# Altium PCB NumatoShieldWithVias.PcbDoc (part 3 of 4)
Units mil, origin at the board's own origin, x right, y up, seen from the top; angles counter-clockwise.
Board outline 5000 x 5000 mil, 4 copper layers (Top Layer, Mid-Layer 1, Mid-Layer 2, Bottom Layer); 8 components, 163 nets, 352 pads, 43 vias.
Unrouted connection lines stored in the file: 11.
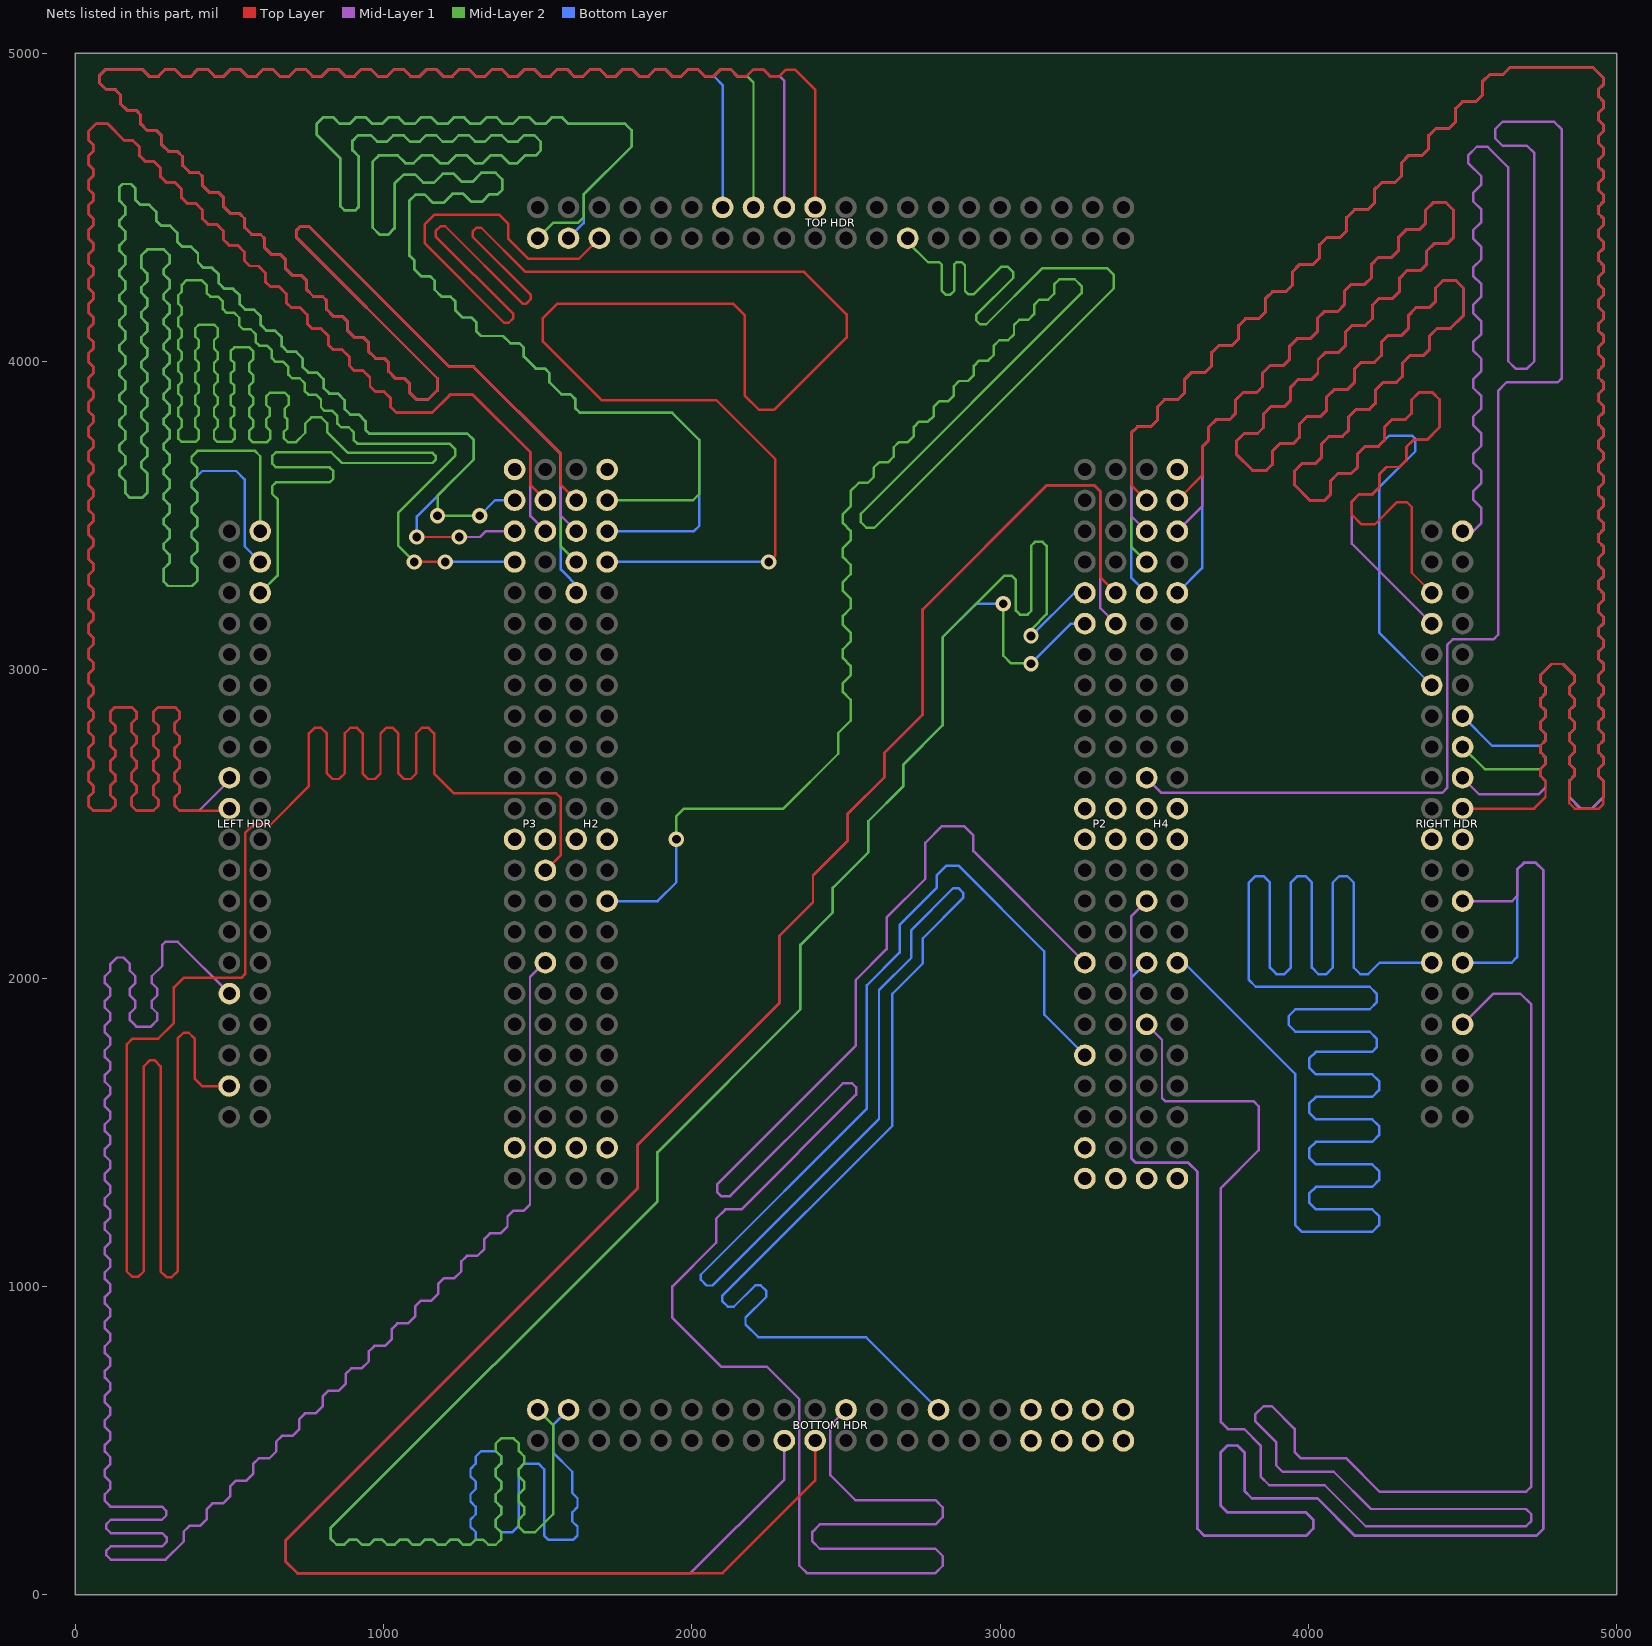
[diagram p5: the nets of this part, all layers, seen from the top]

## Via types
v1: diameter 50, hole 28, Top Layer to Bottom Layer, 43 vias

## Nets (pads, with @x,y where several pads share a name; then routed paths per layer and width w, separated by ;. In a path a pad name is that pad's centre, name@x,y a point inside that pad or via, vN(x,y) a via of type N, cw(c..) or ccw(c..) an arc to the next point about the centre after c; other vN are vias at no path point) (continued)
F18: "TOP HDR.33" H2.40 | length 6911.2
  Bottom Layer w8: H2.40@1650,3250 1637.5,3262.5 1575,3325 1575,3700 1292,3983 1214,3983 758,4439 731,4439 719,4427 719,4401 1174,3946 1174,3906 1145,3877 1107,3877 1084,3900 1084,3929 1069,3944 1040,3944 1017,3967 1017,3996 1002,4011 973,4011 950,4034 950,4063 935,4078 906,4078 883,4101 883,4130 868,4145 839,4145 816,4168 816,4197 801,4212 772,4212 749,4235 749,4264 734,4279 705,4279 682,4302 682,4331 667,4346 638,4346 615,4369 615,4398 600,4413 571,4413 548,4436 548,4465 533,4480 504,4480 481,4503 481,4532 466,4547 437,4547 414,4570 414,4599 399,4614 370,4614 347,4637 347,4666 332,4681 303,4681 280,4704 280,4733 265,4748 235,4748 213,4770 213,4799 198,4814 169,4814 146,4837 146,4866 131,4881 102,4881 79,4904 79,4928 98,4947 218,4947 239,4926 270,4926 291,4947 324,4947 345,4926 376,4926 397,4947 430,4947 451,4926 482,4926 503,4947 536,4947 557,4926 588,4926 609,4947 642,4947 663,4926 694,4926 715,4947 748,4947 769,4926 800,4926 821,4947 854,4947 875,4926 906,4926 927,4947 960,4947 981,4926 1012,4926 1033,4947 1066,4947 1087,4926 1118,4926 1139,4947 1172,4947 1193,4926 1224,4926 1245,4947 1278,4947 1299,4926 1330,4926 1351,4947 1384,4947 1405,4926 1436,4926 1457,4947 1490,4947 1511,4926 1542,4926 1563,4947 1596,4947 1617,4926 1648,4926 1669,4947 1702,4947 1723,4926 1754,4926 1775,4947 1808,4947 1829,4926 1860,4926 1881,4947 1914,4947 1935,4926 1966,4926 1987,4947 2020,4947 2041,4926 2071,4926 2100,4897 2100,4500
G8: "LEFT HDR.15" P3.15 | length 6865.7
  Mid-Layer 1 w8: 500,1950 332,2118 292,2118 282,2108 282,2040 248,2006 248,1984 266,1966 266,1944 248,1926 248,1904 266,1886 266,1864 245,1843 198,1843 177,1864 177,1886 195,1904 195,1926 177,1944 177,1966 195,1984 195,2006 177,2024 177,2046 156,2067 135,2067 114,2046 114,2024 96,2006 96,1984 114,1966 114,1944 96,1926 96,1904 114,1886 114,1864 96,1846 96,1824 114,1806 114,1784 96,1766 96,1744 114,1726 114,1704 96,1686 96,1664 114,1646 114,1624 96,1606 96,1584 114,1566 114,1544 96,1526 96,1504 114,1486 114,1464 96,1446 96,1424 114,1406 114,1384 96,1366 96,1344 114,1326 114,1304 96,1286 96,1264 114,1246 114,1224 96,1206 96,1184 114,1166 114,1144 96,1126 96,1104 114,1086 114,1064 96,1046 96,1024 114,1006 114,984 96,966 96,944 114,926 114,904 96,886 96,864 114,846 114,824 96,806 96,784 114,766 114,744 96,726 96,704 114,686 114,664 96,646 96,624 114,606 114,584 96,566 96,544 114,526 114,504 96,486 96,464 114,446 114,424 96,406 96,384 114,366 114,344 96,326 96,304 114,286 281,286 295,272 295,257 281,243 115,243 101,229 101,214 115,200 282,200 296,186 296,171 282,157 115,157 101,143 101,128 115,114 293,114 352,173 352,205 370,223 404,223 427,246 427,278 445,296 479,296 502,319 502,351 520,369 554,369 577,392 577,424 595,442 629,442 652,465 652,497 670,515 704,515 727,538 727,570 745,588 779,588 802,611 802,643 820,661 854,661 877,684 877,716 895,734 929,734 952,757 952,789 970,807 1004,807 1027,830 1027,862 1045,880 1079,880 1102,903 1102,935 1120,953 1154,953 1177,976 1177,1008 1195,1026 1229,1026 1252,1049 1252,1081 1270,1099 1304,1099 1327,1122 1327,1154 1345,1172 1379,1172 1402,1195 1402,1227 1420,1245 1454,1245 1475,1266 1475,2004 P3.15@1521,2050
G9: "TOP HDR.12" H2.19 | length 6987.7
  Mid-Layer 2 w8: v1(1950,2450) 1950,2526 1974,2550 2297,2550 2475,2728 2475,2795 2515,2835 2515,2903 2490,2928 2490,2957 2515,2982 2515,3013 2490,3038 2490,3067 2515,3092 2515,3121 2490,3146 2490,3175 2515,3200 2515,3231 2490,3256 2490,3285 2515,3310 2515,3341 2490,3366 2490,3395 2515,3420 2515,3451 2490,3476 2490,3505 2515,3530 2515,3580 2542,3607 2571,3607 2590,3626 2590,3656 2607,3673 2636,3673 2655,3692 2655,3722 2672,3739 2701,3739 2720,3758 2720,3788 2737,3805 2766,3805 2785,3824 2785,3854 2802,3871 2831,3871 2850,3890 2850,3920 2867,3937 2896,3937 2915,3956 2915,3986 2932,4003 2961,4003 2980,4022 2980,4052 2997,4069 3026,4069 3045,4088 3045,4118 3062,4135 3091,4135 3110,4154 3110,4184 3127,4201 3156,4201 3175,4220 3175,4250 3192,4267 3242,4267 3264,4245 3264,4222 2548,3506 2548,3479 2566,3461 2592,3461 3369,4238 3369,4281 3348,4302 3136,4302 2955,4121 2935,4121 2922,4134 2922,4151 3043,4272 3043,4289 3025,4307 3003,4307 2914,4218 2897,4218 2886,4229 2886,4312 2876,4322 2858,4322 2851,4315 2851,4229 2839,4217 2823,4217 2811,4229 2811,4314 2803,4322 2766,4322 2700,4388 2700,4400
  Bottom Layer w8: H2.19@1725,2250 1889,2250 1950,2311 v1(1950,2450)
G11: "LEFT HDR.18" P3.21 | length 6918.8
  Top Layer w8: 499.17,1650 411,1650 387,1674 387,1804 368,1823 351,1823 332,1804 332,1049 313,1030 296,1030 277,1049 277,1714 258,1733 241,1733 222,1714 222,1049 204,1031 185,1031 167,1049 167,1785 186,1804 269,1804 320,1855 320,1970 351,2001 539,2001 551,2013 551,2470.3 579.7,2499 634,2499 758,2623 758,2794 776,2812 798,2812 816,2794 816,2664 834,2646 856,2646 874,2664 874,2794 892,2812 914,2812 932,2794 932,2664 950,2646 972,2646 990,2664 990,2794 1008,2812 1030,2812 1048,2794 1048,2664 1066,2646 1088,2646 1106,2664 1106,2794 1124,2812 1146,2812 1164,2794 1164,2664 1229,2599 1560,2599 1575,2584 1575,2400 P3.21@1525,2350
G13: "LEFT HDR.39" P3.46 | length 6865.6
  Mid-Layer 2 w8: 600,3450 600,3693 583,3710 396,3710 377,3691 377,3674 396,3655 396,3629 377,3610 377,3593 396,3574 396,3548 377,3529 377,3512 396,3493 396,3467 377,3448 377,3431 396,3412 396,3386 377,3367 377,3350 396,3331 396,3289 379,3272 301,3272 287,3286 287,3328 306,3347 306,3373 287,3392 287,3409 306,3428 306,3454 287,3473 287,3490 306,3509 306,3535 287,3554 287,3571 306,3590 306,3616 287,3635 287,3652 306,3671 306,3697 287,3716 287,3733 306,3752 306,3778 287,3797 287,3814 306,3833 306,3859 287,3878 287,3895 306,3914 306,3940 287,3959 287,3976 306,3995 306,4021 287,4040 287,4057 306,4076 306,4102 287,4121 287,4138 306,4157 306,4183 287,4202 287,4219 306,4238 306,4264 287,4283 287,4300 306,4319 306,4345 287,4364 234,4364 214,4344 214,4305 233,4286 233,4260 214,4241 214,4224 233,4205 233,4179 214,4160 214,4143 233,4124 233,4098 214,4079 214,4062 233,4043 233,4017 214,3998 214,3981 233,3962 233,3936 214,3917 214,3900 233,3881 233,3855 214,3836 214,3819 233,3800 233,3774 214,3755 214,3738 233,3719 233,3693 214,3674 214,3657 233,3638 233,3574 217,3558 178,3558 162,3574 162,3612 143,3631 143,3648 162,3667 162,3693 143,3712 143,3729 162,3748 162,3774 143,3793 143,3810 162,3829 162,3855 143,3874 143,3891 162,3910 162,3936 143,3955 143,3972 162,3991 162,4017 143,4036 143,4053 162,4072 162,4098 143,4117 143,4134 162,4153 162,4179 143,4198 143,4215 162,4234 162,4260 143,4279 143,4296 162,4315 162,4341 143,4360 143,4377 162,4396 162,4422 143,4441 143,4458 162,4477 162,4503 143,4522 143,4566 153,4576 181,4576 194,4563 194,4526 212,4508 240,4508 262,4486 262,4458 280,4440 308,4440 330,4418 330,4390 348,4372 376,4372 398,4350 398,4322 416,4304 444,4304 466,4282 466,4254 484,4236 512,4236 534,4214 534,4186 552,4168 580,4168 602,4146 602,4118 620,4100 648,4100 670,4078 670,4050 688,4032 716,4032 738,4010 738,3982 756,3964 784,3964 806,3942 806,3914 824,3896 852,3896 874,3874 874,3846 892,3828 920,3828 942,3806 942,3778 954,3766 1272,3766 1293,3745 1293,3683 1175,3565 v1(1175,3500) v1(1312,3500)
  Bottom Layer w8: v1(1312,3500) 1362,3550 P3.46@1425,3550
G14: "LEFT HDR.37" P3.42 | length 6865.6
  Top Layer w8: v1(1100,3350) v1(1200,3350)
  Mid-Layer 2 w8: 504,3815 504,3790 517,3777 517,3750 507,3740 460,3740 450,3750 450,3777 462,3789 462,3811 450,3823 450,3850 462,3862 462,3884 450,3896 450,3923 462,3935 462,3957 450,3969 450,3996 462,4008 462,4030 450,4042 450,4069 462,4081 462,4108 450,4120 401,4120 389,4108 389,4081 401,4069 401,4047 389,4035 389,4008 401,3996 401,3974 389,3962 389,3935 401,3923 401,3901 389,3889 389,3862 401,3850 401,3828 389,3816 389,3789 401,3777 401,3750 391,3740 344,3740 334,3750 334,3777 346,3789 346,3811 334,3823 334,3850 346,3862 346,3884 334,3896 334,3923 346,3935 346,3957 334,3969 334,3996 346,4008 346,4030 334,4042 334,4069 346,4081 346,4103 334,4115 334,4142 346,4154 346,4176 334,4188 334,4215 346,4227 346,4249 361,4264 410,4264 426,4248 426,4223 438,4211 463,4211 479,4195 479,4170 491,4158 516,4158 532,4142 532,4117 544,4105 569,4105 585,4089 585,4064 597,4052 622,4052 638,4036 638,4011 650,3999 675,3999 691,3983 691,3958 703,3946 728,3946 744,3930 744,3905 756,3893 781,3893 797,3877 797,3852 809,3840 834,3840 850,3824 850,3799 862,3787 887,3787 903,3771 903,3746 915,3734 1214,3734 1233,3715 1233,3695 1047,3509 1047,3403 v1(1100,3350) ; 505,3816 516,3827 516,3849 504,3861 504,3888 516,3900 516,3922 504,3934 504,3961 516,3973 516,3995 504,4007 504,4034 516,4046 565,4046 577,4034 577,4007 565,3995 565,3968 577,3956 577,3934 565,3922 565,3895 577,3883 577,3861 565,3849 565,3822 577,3810 577,3788 565,3776 565,3749 575,3739 622,3739 632,3749 632,3776 619,3789 619,3813 631,3825 631,3848 619,3860 619,3887 631,3899 680,3899 692,3887 692,3860 679,3847 679,3822 687,3814 687,3782 676,3771 676,3752 689,3739 716,3739 746,3769 746,3799 766,3819 798,3819 817,3800 817,3771 884,3704 1159,3704 1169,3694 1169,3681 1159,3671 865,3671 830,3706 651,3706 639,3694 639,3669 651,3657 825,3657 837,3645 837,3620 825,3608 651,3608 639,3596 639,3571 656,3554 656,3306 600,3250
  Bottom Layer w8: v1(1200,3350) P3.42@1425,3350
G16: "TOP HDR.2" H2.41 | length 6926.7
  Top Layer w8: 1700,4400 1633,4333 1470,4333 1405,4398 1405,4446 1374,4477 1165,4477 1133,4445 1133,4384 1391,4126 1406,4126 1421,4141 1421,4154 1169,4406 1169,4423 1185,4439 1200,4439 1451,4188 1463,4188 1477,4202 1477,4217 1289,4405 1289,4422 1301,4434 1317,4434 1460,4291 2364,4291 2502,4153 2502,4078 2268,3844 2217,3844 2171,3890 2171,4151 2135,4187 1563,4187 1517,4141 1517,4065 1707,3875 2079,3875 2271,3683 2271,3371 v1(2250,3350)
  Bottom Layer w8: H2.41@1725,3350 v1(2250,3350)
G18: "TOP HDR.32" H2.42 | length 6950.9
  Mid-Layer 2 w8: H2.42@1622,3350 H2.42@1625,3350 ; H2.42@1650,3350 H2.42@1625,3350 ; 2200,4500 2200,4905 2179,4926 2147,4926 2126,4947 2093,4947 2072,4926 2041,4926 2020,4947 1987,4947 1966,4926 1935,4926 1914,4947 1881,4947 1860,4926 1829,4926 1808,4947 1775,4947 1754,4926 1723,4926 1702,4947 1669,4947 1648,4926 1617,4926 1596,4947 1563,4947 1542,4926 1511,4926 1490,4947 1457,4947 1436,4926 1405,4926 1384,4947 1351,4947 1330,4926 1299,4926 1278,4947 1245,4947 1224,4926 1193,4926 1172,4947 1139,4947 1118,4926 1087,4926 1066,4947 1033,4947 1012,4926 981,4926 960,4947 927,4947 906,4926 875,4926 854,4947 821,4947 800,4926 769,4926 748,4947 715,4947 694,4926 663,4926 642,4947 609,4947 588,4926 557,4926 536,4947 503,4947 482,4926 451,4926 430,4947 397,4947 376,4926 345,4926 324,4947 291,4947 270,4926 239,4926 218,4947 98,4947 79,4928 79,4904 102,4881 131,4881 146,4866 146,4837 169,4814 198,4814 213,4799 213,4770 235,4748 265,4748 280,4733 280,4704 303,4681 332,4681 347,4666 347,4637 370,4614 399,4614 414,4599 414,4570 437,4547 466,4547 481,4532 481,4503 504,4480 533,4480 548,4465 548,4436 571,4413 600,4413 615,4398 615,4369 638,4346 667,4346 682,4331 682,4302 705,4279 734,4279 749,4264 749,4235 772,4212 801,4212 816,4197 816,4168 839,4145 868,4145 883,4130 883,4101 906,4078 935,4078 950,4063 950,4034 973,4011 1002,4011 1017,3996 1017,3967 1040,3944 1069,3944 1084,3929 1084,3900 1107,3877 1145,3877 1174,3906 1174,3946 719,4401 719,4427 731,4439 758,4439 1214,3983 1292,3983 1575,3700 1575,3400 H2.42@1625,3350
GND: "BOTTOM HDR.16" "BOTTOM HDR.17" "BOTTOM HDR.18" "BOTTOM HDR.19" "BOTTOM HDR.20" "BOTTOM HDR.21" "BOTTOM HDR.22" "BOTTOM HDR.23" "RIGHT HDR.10" "RIGHT HDR.29" H2.3 H2.4 H2.23 H2.24 H2.47 H4.1 H4.2 H4.23 H4.24 H4.25 H4.26 H4.47 P2.1 P2.2 P2.23 P2.24 P2.25 P2.26 P3.3 P3.4 P3.23 P3.24 P3.48
H12: "LEFT HDR.9" P3.45 | length 6853.5
  Top Layer w8: 500,2550 493,2543 339,2543 323,2559 323,2587 339,2603 339,2623 323,2639 323,2667 339,2683 339,2703 323,2719 323,2747 339,2763 339,2783 323,2799 323,2827 339,2843 339,2863 323,2879 269,2879 253,2863 253,2835 269,2819 269,2799 253,2783 253,2755 269,2739 269,2719 253,2703 253,2675 269,2659 269,2639 253,2623 253,2595 269,2579 269,2559 253,2543 199,2543 183,2559 183,2587 199,2603 199,2623 183,2639 183,2667 199,2683 199,2703 183,2719 183,2747 199,2763 199,2783 183,2799 183,2827 199,2843 199,2863 183,2879 129,2879 113,2863 113,2835 129,2819 129,2799 113,2783 113,2755 129,2739 129,2719 113,2703 113,2675 129,2659 129,2639 113,2623 113,2595 129,2579 129,2559 113,2543 59,2543 43,2559 43,2587 59,2603 59,2623 43,2639 43,2667 59,2683 59,2703 43,2719 43,2747 59,2763 59,2783 43,2799 43,2827 59,2843 59,2863 43,2879 43,2907 59,2923 59,2943 43,2959 43,2987 59,3003 59,3023 43,3039 43,3067 59,3083 59,3103 43,3119 43,3147 59,3163 59,3183 43,3199 43,3227 59,3243 59,3263 43,3279 43,3307 59,3323 59,3343 43,3359 43,3387 59,3403 59,3423 43,3439 43,3467 59,3483 59,3503 43,3519 43,3547 59,3563 59,3583 43,3599 43,3627 59,3643 59,3663 43,3679 43,3707 59,3723 59,3743 43,3759 43,3787 59,3803 59,3823 43,3839 43,3867 59,3883 59,3903 43,3919 43,3947 59,3963 59,3983 43,3999 43,4027 59,4043 59,4063 43,4079 43,4107 59,4123 59,4143 43,4159 43,4187 59,4203 59,4223 43,4239 43,4267 59,4283 59,4303 43,4319 43,4347 59,4363 59,4383 43,4399 43,4427 59,4443 59,4463 43,4479 43,4507 59,4523 59,4543 43,4559 43,4587 59,4603 59,4623 43,4639 43,4667 59,4683 59,4703 43,4719 43,4747 68,4772 104,4772 158,4718 186,4718 208,4696 208,4668 226,4650 254,4650 276,4628 276,4600 294,4582 322,4582 344,4560 344,4532 362,4514 390,4514 412,4492 412,4464 430,4446 458,4446 480,4424 480,4396 498,4378 526,4378 548,4356 548,4328 566,4310 594,4310 616,4288 616,4260 634,4242 662,4242 684,4220 684,4192 702,4174 730,4174 752,4152 752,4124 770,4106 798,4106 820,4084 820,4056 838,4038 866,4038 888,4016 888,3988 906,3970 934,3970 956,3948 956,3920 974,3902 1002,3902 1024,3880 1024,3852 1042,3834 1157,3834 1215,3892 1290,3892 1476,3706 1476,3599 P3.45@1525,3550
H13: "TOP HDR.1" H2.43 | length 6906.5
  Bottom Layer w8: 1600,4400 1649,4449 1649,4542 1805,4698 1805,4750 1784,4771 1600,4771 1579,4792 1546,4792 1525,4771 1494,4771 1473,4792 1440,4792 1419,4771 1388,4771 1367,4792 1334,4792 1313,4771 1282,4771 1261,4792 1228,4792 1207,4771 1176,4771 1155,4792 1122,4792 1101,4771 1070,4771 1049,4792 1016,4792 995,4771 964,4771 943,4792 910,4792 889,4771 858,4771 837,4792 804,4792 783,4771 783,4736 860,4659 860,4504 873,4491 909,4491 919,4501 919,4666 899,4686 899,4716 917,4734 959,4734 980,4713 1011,4713 1032,4734 1065,4734 1086,4713 1117,4713 1138,4734 1171,4734 1192,4713 1223,4713 1244,4734 1277,4734 1298,4713 1329,4713 1350,4734 1383,4734 1404,4713 1435,4713 1456,4734 1489,4734 1510,4713 1510,4685 1494,4669 1459,4669 1434,4644 1407,4644 1382,4669 1347,4669 1322,4644 1295,4644 1270,4669 1235,4669 1210,4644 1183,4644 1158,4669 1123,4669 1098,4644 1071,4644 1046,4669 985,4669 965,4649 965,4434 988,4411 1014,4411 1036,4433 1036,4577 1065,4606 1103,4606 1129,4580 1163,4580 1192,4609 1228,4609 1254,4583 1288,4583 1317,4612 1364,4612 1385,4591 1385,4557 1371,4543 1344,4543 1319,4518 1285,4518 1259,4544 1223,4544 1194,4515 1160,4515 1134,4541 1103,4541 1084,4522 1084,4344 1099,4329 1099,4300 1122,4277 1151,4277 1166,4262 1166,4233 1189,4210 1218,4210 1233,4195 1233,4166 1256,4143 1285,4143 1300,4128 1300,4099 1316,4083 1388,4083 1411,4060 1440,4060 1455,4045 1455,4016 1494,3977 1523,3977 1538,3962 1538,3933 1577,3894 1606,3894 1621,3879 1621,3850 1637,3834 1936,3834 2024,3746 2024,3467 2007,3450 H2.43@1725,3450
H14: "TOP HDR.31" H2.44 | length 6968.2
  Mid-Layer 1 w8: H2.44@1650,3450 H2.44@1625,3450 1575,3500 1575,3700 1292,3983 1214,3983 758,4439 731,4439 719,4427 719,4401 1174,3946 1174,3906 1145,3877 1107,3877 1084,3900 1084,3929 1069,3944 1040,3944 1017,3967 1017,3996 1002,4011 973,4011 950,4034 950,4063 935,4078 906,4078 883,4101 883,4130 868,4145 839,4145 816,4168 816,4197 801,4212 772,4212 749,4235 749,4264 734,4279 705,4279 682,4302 682,4331 667,4346 638,4346 615,4369 615,4398 600,4413 571,4413 548,4436 548,4465 533,4480 504,4480 481,4503 481,4532 466,4547 437,4547 414,4570 414,4599 399,4614 370,4614 347,4637 347,4666 332,4681 303,4681 280,4704 280,4733 265,4748 235,4748 213,4770 213,4799 198,4814 169,4814 146,4837 146,4866 131,4881 102,4881 79,4904 79,4928 98,4947 218,4947 239,4926 270,4926 291,4947 324,4947 345,4926 376,4926 397,4947 430,4947 451,4926 482,4926 503,4947 536,4947 557,4926 588,4926 609,4947 642,4947 663,4926 694,4926 715,4947 748,4947 769,4926 800,4926 821,4947 854,4947 875,4926 906,4926 927,4947 960,4947 981,4926 1012,4926 1033,4947 1066,4947 1087,4926 1118,4926 1139,4947 1172,4947 1193,4926 1224,4926 1245,4947 1278,4947 1299,4926 1330,4926 1351,4947 1384,4947 1405,4926 1436,4926 1457,4947 1490,4947 1511,4926 1542,4926 1563,4947 1596,4947 1617,4926 1648,4926 1669,4947 1702,4947 1723,4926 1754,4926 1775,4947 1808,4947 1829,4926 1860,4926 1881,4947 1914,4947 1935,4926 1966,4926 1987,4947 2020,4947 2041,4926 2072,4926 2093,4947 2126,4947 2147,4926 2178,4926 2199,4947 2232,4947 2253,4926 2284,4926 2300,4910 2300,4500
H15: "LEFT HDR.8" P3.43 | length 6999.6
  Mid-Layer 1 w8: 500,2650 500,2642 401,2543 339,2543 323,2559 323,2587 339,2603 339,2623 323,2639 323,2667 339,2683 339,2703 323,2719 323,2747 339,2763 339,2783 323,2799 323,2827 339,2843 339,2863 323,2879 269,2879 253,2863 253,2835 269,2819 269,2799 253,2783 253,2755 269,2739 269,2719 253,2703 253,2675 269,2659 269,2639 253,2623 253,2595 269,2579 269,2559 253,2543 199,2543 183,2559 183,2587 199,2603 199,2623 183,2639 183,2667 199,2683 199,2703 183,2719 183,2747 199,2763 199,2783 183,2799 183,2827 199,2843 199,2863 183,2879 129,2879 113,2863 113,2835 129,2819 129,2799 113,2783 113,2755 129,2739 129,2719 113,2703 113,2675 129,2659 129,2639 113,2623 113,2595 129,2579 129,2559 113,2543 59,2543 43,2559 43,2587 59,2603 59,2623 43,2639 43,2667 59,2683 59,2703 43,2719 43,2747 59,2763 59,2783 43,2799 43,2827 59,2843 59,2863 43,2879 43,2907 59,2923 59,2943 43,2959 43,2987 59,3003 59,3023 43,3039 43,3067 59,3083 59,3103 43,3119 43,3147 59,3163 59,3183 43,3199 43,3227 59,3243 59,3263 43,3279 43,3307 59,3323 59,3343 43,3359 43,3387 59,3403 59,3423 43,3439 43,3467 59,3483 59,3503 43,3519 43,3547 59,3563 59,3583 43,3599 43,3627 59,3643 59,3663 43,3679 43,3707 59,3723 59,3743 43,3759 43,3787 59,3803 59,3823 43,3839 43,3867 59,3883 59,3903 43,3919 43,3947 59,3963 59,3983 43,3999 43,4027 59,4043 59,4063 43,4079 43,4107 59,4123 59,4143 43,4159 43,4187 59,4203 59,4223 43,4239 43,4267 59,4283 59,4303 43,4319 43,4347 59,4363 59,4383 43,4399 43,4427 59,4443 59,4463 43,4479 43,4507 59,4523 59,4543 43,4559 43,4587 59,4603 59,4623 43,4639 43,4667 59,4683 59,4703 43,4719 43,4747 68,4772 104,4772 158,4718 186,4718 208,4696 208,4668 226,4650 254,4650 276,4628 276,4600 294,4582 322,4582 344,4560 344,4532 362,4514 390,4514 412,4492 412,4464 430,4446 458,4446 480,4424 480,4396 498,4378 526,4378 548,4356 548,4328 566,4310 594,4310 616,4288 616,4260 634,4242 662,4242 684,4220 684,4192 702,4174 730,4174 752,4152 752,4124 770,4106 798,4106 820,4084 820,4056 838,4038 866,4038 888,4016 888,3988 906,3970 934,3970 956,3948 956,3920 974,3902 1002,3902 1024,3880 1024,3852 1042,3834 1157,3834 1215,3892 1290,3892 1476,3706 1476,3499 P3.43@1525,3450
H16: "LEFT HDR.38" P3.44 | length 6925.6
  Top Layer w8: v1(1108,3431) v1(1245,3431)
  Mid-Layer 1 w8: v1(1245,3431) 1313,3431 1332,3450 P3.44@1425,3450
  Bottom Layer w8: 600,3350 549,3401 549,3618 522,3645 412,3645 377,3610 377,3593 396,3574 396,3548 377,3529 377,3512 396,3493 396,3467 377,3448 377,3431 396,3412 396,3386 377,3367 377,3350 396,3331 396,3289 379,3272 301,3272 287,3286 287,3328 306,3347 306,3373 287,3392 287,3409 306,3428 306,3454 287,3473 287,3490 306,3509 306,3535 287,3554 287,3571 306,3590 306,3616 287,3635 287,3652 306,3671 306,3697 287,3716 287,3733 306,3752 306,3778 287,3797 287,3814 306,3833 306,3859 287,3878 287,3895 306,3914 306,3940 287,3959 287,3976 306,3995 306,4021 287,4040 287,4057 306,4076 306,4102 287,4121 287,4138 306,4157 306,4183 287,4202 287,4219 306,4238 306,4264 287,4283 287,4300 306,4319 306,4345 287,4364 234,4364 214,4344 214,4305 233,4286 233,4260 214,4241 214,4224 233,4205 233,4179 214,4160 214,4143 233,4124 233,4098 214,4079 214,4062 233,4043 233,4017 214,3998 214,3981 233,3962 233,3936 214,3917 214,3900 233,3881 233,3855 214,3836 214,3819 233,3800 233,3774 214,3755 214,3738 233,3719 233,3693 214,3674 214,3657 233,3638 233,3574 217,3558 178,3558 162,3574 162,3612 143,3631 143,3648 162,3667 162,3693 143,3712 143,3729 162,3748 162,3774 143,3793 143,3810 162,3829 162,3855 143,3874 143,3891 162,3910 162,3936 143,3955 143,3972 162,3991 162,4017 143,4036 143,4053 162,4072 162,4098 143,4117 143,4134 162,4153 162,4179 143,4198 143,4215 162,4234 162,4260 143,4279 143,4296 162,4315 162,4341 143,4360 143,4377 162,4396 162,4422 143,4441 143,4458 162,4477 162,4503 143,4522 143,4566 153,4576 181,4576 194,4563 194,4526 212,4508 240,4508 262,4486 262,4458 280,4440 308,4440 330,4418 330,4390 348,4372 376,4372 398,4350 398,4322 416,4304 444,4304 466,4282 466,4254 484,4236 512,4236 534,4214 534,4186 552,4168 580,4168 602,4146 602,4118 620,4100 648,4100 670,4078 670,4050 688,4032 716,4032 738,4010 738,3982 756,3964 784,3964 806,3942 806,3914 824,3896 852,3896 874,3874 874,3846 892,3828 920,3828 942,3806 942,3778 954,3766 1272,3766 1293,3745 1293,3683 1108,3498 v1(1108,3431)
INITB: P2.4
J13: "TOP HDR.0" H2.45 | length 6893.6
  Mid-Layer 2 w8: 1500,4400 1551,4451 1632,4451 1649,4468 1649,4542 1805,4698 1805,4750 1784,4771 1600,4771 1579,4792 1546,4792 1525,4771 1494,4771 1473,4792 1440,4792 1419,4771 1388,4771 1367,4792 1334,4792 1313,4771 1282,4771 1261,4792 1228,4792 1207,4771 1176,4771 1155,4792 1122,4792 1101,4771 1070,4771 1049,4792 1016,4792 995,4771 964,4771 943,4792 910,4792 889,4771 858,4771 837,4792 804,4792 783,4771 783,4736 860,4659 860,4504 873,4491 909,4491 919,4501 919,4666 899,4686 899,4716 917,4734 959,4734 980,4713 1011,4713 1032,4734 1065,4734 1086,4713 1117,4713 1138,4734 1171,4734 1192,4713 1223,4713 1244,4734 1277,4734 1298,4713 1329,4713 1350,4734 1383,4734 1404,4713 1435,4713 1456,4734 1489,4734 1510,4713 1510,4685 1494,4669 1459,4669 1434,4644 1407,4644 1382,4669 1347,4669 1322,4644 1295,4644 1270,4669 1235,4669 1210,4644 1183,4644 1158,4669 1123,4669 1098,4644 1071,4644 1046,4669 985,4669 965,4649 965,4434 988,4411 1014,4411 1036,4433 1036,4577 1065,4606 1103,4606 1129,4580 1163,4580 1192,4609 1228,4609 1254,4583 1288,4583 1317,4612 1364,4612 1385,4591 1385,4557 1371,4543 1344,4543 1319,4518 1285,4518 1259,4544 1223,4544 1194,4515 1160,4515 1134,4541 1103,4541 1084,4522 1084,4344 1099,4329 1099,4300 1122,4277 1151,4277 1166,4262 1166,4233 1189,4210 1218,4210 1233,4195 1233,4166 1256,4143 1285,4143 1300,4128 1300,4099 1316,4083 1388,4083 1411,4060 1440,4060 1455,4045 1455,4016 1494,3977 1523,3977 1538,3962 1538,3933 1577,3894 1606,3894 1621,3879 1621,3850 1637,3834 1936,3834 2024,3746 2024,3570 2004,3550 H2.45@1725,3550
K12: "RIGHT HDR.30" H4.46 | length 6866.6
  Top Layer w8: H4.46@3475,3550 3425,3600 3425,3768 3445,3788 3488,3788 3509,3809 3509,3852 3533,3876 3576,3876 3597,3897 3597,3940 3621,3964 3664,3964 3685,3985 3685,4028 3709,4052 3752,4052 3773,4073 3773,4116 3797,4140 3840,4140 3861,4161 3861,4204 3885,4228 3928,4228 3949,4249 3949,4292 3973,4316 4016,4316 4037,4337 4037,4380 4061,4404 4104,4404 4125,4425 4125,4468 4149,4492 4192,4492 4213,4513 4213,4556 4237,4580 4280,4580 4301,4601 4301,4644 4325,4668 4368,4668 4389,4689 4389,4732 4413,4756 4456,4756 4477,4777 4477,4820 4501,4844 4544,4844 4565,4865 4565,4908 4589,4932 4632,4932 4653,4953 4924,4953 4957,4920 4957,4899 4940,4882 4940,4861 4957,4844 4957,4823 4940,4806 4940,4785 4957,4768 4957,4747 4940,4730 4940,4709 4957,4692 4957,4671 4940,4654 4940,4633 4957,4616 4957,4595 4940,4578 4940,4557 4957,4540 4957,4519 4940,4502 4940,4481 4957,4464 4957,4443 4940,4426 4940,4405 4957,4388 4957,4367 4940,4350 4940,4329 4957,4312 4957,4291 4940,4274 4940,4253 4957,4236 4957,4215 4940,4198 4940,4177 4957,4160 4957,4139 4940,4122 4940,4101 4957,4084 4957,4063 4940,4046 4940,4025 4957,4008 4957,3987 4940,3970 4940,3949 4957,3932 4957,3911 4940,3894 4940,3873 4957,3856 4957,3835 4940,3818 4940,3797 4957,3780 4957,3759 4940,3742 4940,3721 4957,3704 4957,3683 4940,3666 4940,3645 4957,3628 4957,3607 4940,3590 4940,3569 4957,3552 4957,3531 4940,3514 4940,3493 4957,3476 4957,3455 4940,3438 4940,3417 4957,3400 4957,3379 4940,3362 4940,3341 4957,3324 4957,3303 4940,3286 4940,3265 4957,3248 4957,3227 4940,3210 4940,3189 4957,3172 4957,3151 4940,3134 4940,3113 4957,3096 4957,3075 4940,3058 4940,3037 4957,3020 4957,2999 4940,2982 4940,2961 4957,2944 4957,2923 4940,2906 4940,2885 4957,2868 4957,2847 4940,2830 4940,2809 4957,2792 4957,2771 4940,2754 4940,2733 4957,2716 4957,2695 4940,2678 4940,2657 4957,2640 4957,2565 4942,2550 4864,2550 4846,2568 4846,2640 4863,2657 4863,2678 4846,2695 4846,2716 4863,2733 4863,2754 4846,2771 4846,2792 4863,2809 4863,2830 4846,2847 4846,2868 4863,2885 4863,2906 4846,2923 4846,2944 4863,2961 4863,2982 4826,3019 4789,3019 4752,2982 4752,2961 4769,2944 4769,2923 4752,2906 4752,2885 4769,2868 4769,2847 4752,2830 4752,2809 4769,2792 4769,2771 4752,2754 4752,2733 4769,2716 4769,2695 4752,2678 4752,2657 4769,2640 4769,2587 4732,2550 4500,2550
K13: "RIGHT HDR.2" H4.45 | length 6952.1
  Top Layer w8: H4.45@3575,3550 3655,3630 3655,3723 3676,3744 3676,3787 3700,3811 3743,3811 3764,3832 3764,3875 3788,3899 3831,3899 3852,3920 3852,3963 3876,3987 3919,3987 3940,4008 3940,4051 3964,4075 4007,4075 4028,4096 4028,4139 4052,4163 4095,4163 4116,4184 4116,4227 4140,4251 4183,4251 4204,4272 4204,4315 4228,4339 4271,4339 4292,4360 4292,4403 4316,4427 4359,4427 4380,4448 4380,4491 4404,4515 4447,4515 4471,4491 4471,4403 4450,4382 4407,4382 4383,4358 4383,4315 4362,4294 4319,4294 4295,4270 4295,4227 4274,4206 4231,4206 4207,4182 4207,4139 4186,4118 4143,4118 4119,4094 4119,4051 4098,4030 4055,4030 4031,4006 4031,3963 4010,3942 3967,3942 3943,3918 3943,3875 3922,3854 3879,3854 3855,3830 3855,3787 3834,3766 3791,3766 3767,3742 3767,3699 3820,3646 3863,3646 3884,3667 3884,3710 3908,3734 3951,3734 3972,3755 3972,3798 3996,3822 4039,3822 4060,3843 4060,3886 4084,3910 4127,3910 4148,3931 4148,3974 4172,3998 4215,3998 4236,4019 4236,4062 4260,4086 4303,4086 4324,4107 4324,4150 4348,4174 4391,4174 4412,4195 4412,4238 4436,4262 4479,4262 4503,4238 4503,4150 4461,4108 4418,4108 4394,4084 4394,4041 4373,4020 4330,4020 4306,3996 4306,3953 4285,3932 4242,3932 4218,3908 4218,3865 4197,3844 4154,3844 4130,3820 4130,3777 4109,3756 4066,3756 4042,3732 4042,3689 4021,3668 3978,3668 3954,3644 3954,3601 4007,3548 4050,3548 4071,3569 4071,3612 4095,3636 4138,3636 4159,3657 4159,3700 4183,3724 4226,3724 4247,3745 4247,3788 4271,3812 4314,3812 4335,3833 4335,3876 4359,3900 4402,3900 4426,3876 4426,3788 4384,3746 4341,3746 4317,3722 4317,3679 4296,3658 4253,3658 4229,3634 4229,3591 4208,3570 4165,3570 4141,3546 4141,3503 4172,3472 4215,3472 4287,3544 4319,3544 4335,3528 4335,3315 4400,3250
K14: "TOP HDR.30" H2.46 | length 6966.2
  Top Layer w8: H2.46@1625,3550 1575,3600 1575,3700 1292,3983 1214,3983 758,4439 731,4439 719,4427 719,4401 1174,3946 1174,3906 1145,3877 1107,3877 1084,3900 1084,3929 1069,3944 1040,3944 1017,3967 1017,3996 1002,4011 973,4011 950,4034 950,4063 935,4078 906,4078 883,4101 883,4130 868,4145 839,4145 816,4168 816,4197 801,4212 772,4212 749,4235 749,4264 734,4279 705,4279 682,4302 682,4331 667,4346 638,4346 615,4369 615,4398 600,4413 571,4413 548,4436 548,4465 533,4480 504,4480 481,4503 481,4532 466,4547 437,4547 414,4570 414,4599 399,4614 370,4614 347,4637 347,4666 332,4681 303,4681 280,4704 280,4733 265,4748 235,4748 213,4770 213,4799 198,4814 169,4814 146,4837 146,4866 131,4881 102,4881 79,4904 79,4928 98,4947 218,4947 239,4926 270,4926 291,4947 324,4947 345,4926 376,4926 397,4947 430,4947 451,4926 482,4926 503,4947 536,4947 557,4926 588,4926 609,4947 642,4947 663,4926 694,4926 715,4947 748,4947 769,4926 800,4926 821,4947 854,4947 875,4926 906,4926 927,4947 960,4947 981,4926 1012,4926 1033,4947 1066,4947 1087,4926 1118,4926 1139,4947 1172,4947 1193,4926 1224,4926 1245,4947 1278,4947 1299,4926 1330,4926 1351,4947 1384,4947 1405,4926 1436,4926 1457,4947 1490,4947 1511,4926 1542,4926 1563,4947 1596,4947 1617,4926 1648,4926 1669,4947 1702,4947 1723,4926 1754,4926 1775,4947 1808,4947 1829,4926 1860,4926 1881,4947 1914,4947 1935,4926 1966,4926 1987,4947 2020,4947 2041,4926 2072,4926 2093,4947 2126,4947 2147,4926 2178,4926 2199,4947 2232,4947 2253,4926 2284,4926 2305,4947 2335,4947 2400,4882 2400,4500 ; H2.46@1628,3550 H2.46@1650,3550
K15: "BOTTOM HDR.38" P2.38 | length 6899
  Mid-Layer 2 w8: v1(3010,3215) 3010,3046 3035,3021 3043,3021 v1@3103,3021
  Bottom Layer w8: 1600,600 1550,550 1550,461 1612,399 1612,330 1629,313 1629,284 1612,267 1612,238 1629,221 1629,192 1615,178 1535,178 1521,192 1521,407 1503,425 1456,425 1439,408 1439,224 1418,203 1381,203 1364,220 1364,244 1381,261 1381,285 1364,302 1364,326 1381,343 1381,367 1364,384 1364,408 1381,425 1381,449 1364,466 1317,466 1299,448 1299,425 1282,408 1282,384 1299,367 1299,343 1282,326 1282,302 1299,285 1299,261 1282,244 1282,220 1299,203 1299,179 1282,162 1258,162 1241,179 1217,179 1200,162 1176,162 1159,179 1135,179 1118,162 1094,162 1077,179 1053,179 1036,162 1012,162 995,179 971,179 954,162 930,162 913,179 889,179 872,162 848,162 828,182 828,216 1888,1276 1888,1435 2352,1899 2352,2108 2457,2213 2457,2293 2572,2408 2572,2509 2686,2623 2686,2693 2814,2821 2814,3106 2923,3215 v1(3010,3215) ; v1(3100,3020) 3230,3150 P2.38@3275,3150
K16: "BOTTOM HDR.8" P2.37 | length 7030.8
  Mid-Layer 1 w8: 2300,500 2300,374 1996,70 720,70 682,108 682,176 1825,1319 1825,1460 2283,1918 2283,2136 2393,2246 2393,2333 2505,2445 2505,2532 2624,2651 2624,2730 2749,2855 2749,3196 3152,3599 3305,3599 3325,3579 3325,3200 P2.37@3375,3150
L12: "BOTTOM HDR.39" P2.40 | length 6966.7
  Mid-Layer 2 w8: 1500,600 1550,550 1550,261 1492,203 1456,203 1439,220 1439,244 1456,261 1456,285 1439,302 1439,326 1456,343 1456,367 1439,384 1439,408 1456,425 1456,449 1439,466 1439,490 1422,507 1381,507 1364,490 1364,466 1381,449 1381,425 1364,408 1364,384 1381,367 1381,343 1364,326 1364,302 1381,285 1381,261 1364,244 1364,220 1381,203 1381,179 1364,162 1340,162 1323,179 1299,179 1282,162 1258,162 1241,179 1217,179 1200,162 1176,162 1159,179 1135,179 1118,162 1094,162 1077,179 1053,179 1036,162 1012,162 995,179 971,179 954,162 930,162 913,179 889,179 872,162 848,162 828,182 828,216 1888,1276 1888,1435 2352,1899 2352,2108 2457,2213 2457,2293 2572,2408 2572,2509 2686,2623 2686,2693 2814,2821 2814,3106 3013,3305 3038,3305 3051,3292 3051,3192 3064,3179 3089,3179 3101,3191 3101,3403 3113,3415 3138,3415 3151,3402 3151,3181 3103,3133 3103,3110 v1@3103,3109
  Bottom Layer w8: v1@3100,3109 3100.5,3109.5 3241,3250 P2.40@3275,3250
  other v1: 3100,3110
L13: "BOTTOM HDR.9" P2.39 | length 7033.1
  Top Layer w8: 2400,500 2400,370 2100,70 720,70 682,108 682,176 1825,1319 1825,1460 2283,1918 2283,2136 2393,2246 2393,2333 2505,2445 2505,2532 2624,2651 2624,2730 2749,2855 2749,3196 3152,3599 3305,3599 3325,3579 3325,3300 P2.39@3375,3250
L14: "RIGHT HDR.31" H4.44 | length 6927.1
  Mid-Layer 1 w8: H4.44@3475,3450 3425,3500 3425,3768 3445,3788 3488,3788 3509,3809 3509,3852 3533,3876 3576,3876 3597,3897 3597,3940 3621,3964 3664,3964 3685,3985 3685,4028 3709,4052 3752,4052 3773,4073 3773,4116 3797,4140 3840,4140 3861,4161 3861,4204 3885,4228 3928,4228 3949,4249 3949,4292 3973,4316 4016,4316 4037,4337 4037,4380 4061,4404 4104,4404 4125,4425 4125,4468 4149,4492 4192,4492 4213,4513 4213,4556 4237,4580 4280,4580 4301,4601 4301,4644 4325,4668 4368,4668 4389,4689 4389,4732 4413,4756 4456,4756 4477,4777 4477,4820 4501,4844 4544,4844 4565,4865 4565,4908 4589,4932 4632,4932 4653,4953 4924,4953 4957,4920 4957,4899 4940,4882 4940,4861 4957,4844 4957,4823 4940,4806 4940,4785 4957,4768 4957,4747 4940,4730 4940,4709 4957,4692 4957,4671 4940,4654 4940,4633 4957,4616 4957,4595 4940,4578 4940,4557 4957,4540 4957,4519 4940,4502 4940,4481 4957,4464 4957,4443 4940,4426 4940,4405 4957,4388 4957,4367 4940,4350 4940,4329 4957,4312 4957,4291 4940,4274 4940,4253 4957,4236 4957,4215 4940,4198 4940,4177 4957,4160 4957,4139 4940,4122 4940,4101 4957,4084 4957,4063 4940,4046 4940,4025 4957,4008 4957,3987 4940,3970 4940,3949 4957,3932 4957,3911 4940,3894 4940,3873 4957,3856 4957,3835 4940,3818 4940,3797 4957,3780 4957,3759 4940,3742 4940,3721 4957,3704 4957,3683 4940,3666 4940,3645 4957,3628 4957,3607 4940,3590 4940,3569 4957,3552 4957,3531 4940,3514 4940,3493 4957,3476 4957,3455 4940,3438 4940,3417 4957,3400 4957,3379 4940,3362 4940,3341 4957,3324 4957,3303 4940,3286 4940,3265 4957,3248 4957,3227 4940,3210 4940,3189 4957,3172 4957,3151 4940,3134 4940,3113 4957,3096 4957,3075 4940,3058 4940,3037 4957,3020 4957,2999 4940,2982 4940,2961 4957,2944 4957,2923 4940,2906 4940,2885 4957,2868 4957,2847 4940,2830 4940,2809 4957,2792 4957,2771 4940,2754 4940,2733 4957,2716 4957,2695 4940,2678 4940,2657 4957,2640 4957,2587 4920,2550 4883,2550 4846,2587 4846,2640 4863,2657 4863,2678 4846,2695 4846,2716 4863,2733 4863,2754 4846,2771 4846,2792 4863,2809 4863,2830 4846,2847 4846,2868 4863,2885 4863,2906 4846,2923 4846,2944 4863,2961 4863,2982 4826,3019 4789,3019 4752,2982 4752,2961 4769,2944 4769,2923 4752,2906 4752,2885 4769,2868 4769,2847 4752,2830 4752,2809 4769,2792 4769,2771 4752,2754 4752,2733 4769,2716 4769,2695 4752,2678 4752,2657 4769,2640 4769,2619 4746,2596 4554,2596 4500,2650
L15: "RIGHT HDR.33" H4.40 | length 6961.9
  Bottom Layer w8: H4.40@3475,3250 3425,3300 3425,3768 3445,3788 3488,3788 3509,3809 3509,3852 3533,3876 3576,3876 3597,3897 3597,3940 3621,3964 3664,3964 3685,3985 3685,4028 3709,4052 3752,4052 3773,4073 3773,4116 3797,4140 3840,4140 3861,4161 3861,4204 3885,4228 3928,4228 3949,4249 3949,4292 3973,4316 4016,4316 4037,4337 4037,4380 4061,4404 4104,4404 4125,4425 4125,4468 4149,4492 4192,4492 4213,4513 4213,4556 4237,4580 4280,4580 4301,4601 4301,4644 4325,4668 4368,4668 4389,4689 4389,4732 4413,4756 4456,4756 4477,4777 4477,4820 4501,4844 4544,4844 4565,4865 4565,4908 4589,4932 4632,4932 4653,4953 4924,4953 4957,4920 4957,4899 4940,4882 4940,4861 4957,4844 4957,4823 4940,4806 4940,4785 4957,4768 4957,4747 4940,4730 4940,4709 4957,4692 4957,4671 4940,4654 4940,4633 4957,4616 4957,4595 4940,4578 4940,4557 4957,4540 4957,4519 4940,4502 4940,4481 4957,4464 4957,4443 4940,4426 4940,4405 4957,4388 4957,4367 4940,4350 4940,4329 4957,4312 4957,4291 4940,4274 4940,4253 4957,4236 4957,4215 4940,4198 4940,4177 4957,4160 4957,4139 4940,4122 4940,4101 4957,4084 4957,4063 4940,4046 4940,4025 4957,4008 4957,3987 4940,3970 4940,3949 4957,3932 4957,3911 4940,3894 4940,3873 4957,3856 4957,3835 4940,3818 4940,3797 4957,3780 4957,3759 4940,3742 4940,3721 4957,3704 4957,3683 4940,3666 4940,3645 4957,3628 4957,3607 4940,3590 4940,3569 4957,3552 4957,3531 4940,3514 4940,3493 4957,3476 4957,3455 4940,3438 4940,3417 4957,3400 4957,3379 4940,3362 4940,3341 4957,3324 4957,3303 4940,3286 4940,3265 4957,3248 4957,3227 4940,3210 4940,3189 4957,3172 4957,3151 4940,3134 4940,3113 4957,3096 4957,3075 4940,3058 4940,3037 4957,3020 4957,2999 4940,2982 4940,2961 4957,2944 4957,2923 4940,2906 4940,2885 4957,2868 4957,2847 4940,2830 4940,2809 4957,2792 4957,2771 4940,2754 4940,2733 4957,2716 4957,2695 4940,2678 4940,2657 4957,2640 4957,2587 4920,2550 4883,2550 4846,2587 4846,2640 4863,2657 4863,2678 4846,2695 4846,2716 4863,2733 4863,2754 4846,2771 4846,2792 4863,2809 4863,2830 4846,2847 4846,2868 4863,2885 4863,2906 4846,2923 4846,2944 4863,2961 4863,2982 4826,3019 4789,3019 4752,2982 4752,2961 4769,2944 4769,2923 4752,2906 4752,2885 4769,2868 4769,2847 4752,2830 4752,2809 4769,2792 4769,2771 4752,2754 4596,2754 4500,2850
L16: "RIGHT HDR.5" H4.39 | length 6863.3
  Bottom Layer w8: H4.39@3575,3250 3655,3330 3655,3723 3676,3744 3676,3787 3700,3811 3743,3811 3764,3832 3764,3875 3788,3899 3831,3899 3852,3920 3852,3963 3876,3987 3919,3987 3940,4008 3940,4051 3964,4075 4007,4075 4028,4096 4028,4139 4052,4163 4095,4163 4116,4184 4116,4227 4140,4251 4183,4251 4204,4272 4204,4315 4228,4339 4271,4339 4292,4360 4292,4403 4316,4427 4359,4427 4380,4448 4380,4491 4404,4515 4447,4515 4471,4491 4471,4403 4450,4382 4407,4382 4383,4358 4383,4315 4362,4294 4319,4294 4295,4270 4295,4227 4274,4206 4231,4206 4207,4182 4207,4139 4186,4118 4143,4118 4119,4094 4119,4051 4098,4030 4055,4030 4031,4006 4031,3963 4010,3942 3967,3942 3943,3918 3943,3875 3922,3854 3879,3854 3855,3830 3855,3787 3834,3766 3791,3766 3767,3742 3767,3699 3820,3646 3863,3646 3884,3667 3884,3710 3908,3734 3951,3734 3972,3755 3972,3798 3996,3822 4039,3822 4060,3843 4060,3886 4084,3910 4127,3910 4148,3931 4148,3974 4172,3998 4215,3998 4236,4019 4236,4062 4260,4086 4303,4086 4324,4107 4324,4150 4348,4174 4391,4174 4412,4195 4412,4238 4436,4262 4479,4262 4503,4238 4503,4150 4461,4108 4418,4108 4394,4084 4394,4041 4373,4020 4330,4020 4306,3996 4306,3953 4285,3932 4242,3932 4218,3908 4218,3865 4197,3844 4154,3844 4130,3820 4130,3777 4109,3756 4066,3756 4042,3732 4042,3689 4021,3668 3978,3668 3954,3644 3954,3601 4007,3548 4050,3548 4071,3569 4071,3612 4095,3636 4138,3636 4159,3657 4159,3700 4183,3724 4226,3724 4262,3760 4336,3760 4347,3749 4347,3709 4229,3591 4229,3121 4400,2950
M8: "RIGHT HDR.25" H4.16 | length 6928.6
  Bottom Layer w8: H4.16@3475,2050 3425,2000 3425,1417 3441,1401 3611,1401 3640,1372 3640,214 3663,191 3992,191 4015,214 4015,244 3992,267 3738,267 3715,290 3715,461 3738,484 3770,484 3793,461 3793,336 3816,313 4029,313 4151,191 4739,191 4762,214 4762,2350 4738,2374 4699,2374 4677,2352 4677,2068 4659,2050 4500,2050
M10: "RIGHT HDR.27" H4.20 | length 6929.8
  Mid-Layer 1 w8: H4.20@3475,2250 3425,2200 3425,1417 3441,1401 3611,1401 3640,1372 3640,214 3663,191 3992,191 4015,214 4015,244 3992,267 3738,267 3715,290 3715,461 3738,484 3770,484 3793,461 3793,336 3816,313 4029,313 4151,191 4739,191 4762,214 4762,2350 4738,2374 4699,2374 4677,2352 4677,2266 4661,2250 4500,2250
M11: "RIGHT HDR.39" H4.28 | length 6940.2
  Mid-Layer 1 w8: H4.28@3475,2650 3524,2601 4434,2601 4451,2618 4451,3082 4468,3099 4600,3099 4615,3114 4615,3905 4643,3933 4809,3933 4821,3945 4821,4754 4797,4778 4630,4778 4606,4754 4606,4724 4630,4700 4709,4700 4733,4676 4733,4001 4709,3977 4672,3977 4648,4001 4648,4630 4581,4697 4546,4697 4519,4670 4519,4643 4561,4601 4561,4574 4534,4547 4534,4520 4561,4493 4561,4453 4534,4426 4534,4399 4561,4372 4561,4332 4534,4305 4534,4278 4561,4251 4561,4211 4534,4184 4534,4157 4561,4130 4561,4090 4534,4063 4534,4036 4561,4009 4561,3969 4534,3942 4534,3915 4561,3888 4561,3848 4534,3821 4534,3794 4561,3767 4561,3727 4534,3700 4534,3673 4561,3646 4561,3606 4534,3579 4534,3552 4561,3525 4561,3476 4535,3450 4500,3450
M13: "RIGHT HDR.3" H4.43 | length 6964.2
  Mid-Layer 1 w8: H4.43@3575,3450 3655,3530 3655,3723 3676,3744 3676,3787 3700,3811 3743,3811 3764,3832 3764,3875 3788,3899 3831,3899 3852,3920 3852,3963 3876,3987 3919,3987 3940,4008 3940,4051 3964,4075 4007,4075 4028,4096 4028,4139 4052,4163 4095,4163 4116,4184 4116,4227 4140,4251 4183,4251 4204,4272 4204,4315 4228,4339 4271,4339 4292,4360 4292,4403 4316,4427 4359,4427 4380,4448 4380,4491 4404,4515 4447,4515 4471,4491 4471,4403 4450,4382 4407,4382 4383,4358 4383,4315 4362,4294 4319,4294 4295,4270 4295,4227 4274,4206 4231,4206 4207,4182 4207,4139 4186,4118 4143,4118 4119,4094 4119,4051 4098,4030 4055,4030 4031,4006 4031,3963 4010,3942 3967,3942 3943,3918 3943,3875 3922,3854 3879,3854 3855,3830 3855,3787 3834,3766 3791,3766 3767,3742 3767,3699 3820,3646 3863,3646 3884,3667 3884,3710 3908,3734 3951,3734 3972,3755 3972,3798 3996,3822 4039,3822 4060,3843 4060,3886 4084,3910 4127,3910 4148,3931 4148,3974 4172,3998 4215,3998 4236,4019 4236,4062 4260,4086 4303,4086 4324,4107 4324,4150 4348,4174 4391,4174 4412,4195 4412,4238 4436,4262 4479,4262 4503,4238 4503,4150 4461,4108 4418,4108 4394,4084 4394,4041 4373,4020 4330,4020 4306,3996 4306,3953 4285,3932 4242,3932 4218,3908 4218,3865 4197,3844 4154,3844 4130,3820 4130,3777 4109,3756 4066,3756 4042,3732 4042,3689 4021,3668 3978,3668 3954,3644 3954,3601 4007,3548 4050,3548 4071,3569 4071,3612 4095,3636 4138,3636 4159,3657 4159,3700 4183,3724 4226,3724 4247,3745 4247,3788 4271,3812 4314,3812 4335,3833 4335,3876 4359,3900 4402,3900 4426,3876 4426,3788 4384,3746 4341,3746 4317,3722 4317,3679 4296,3658 4253,3658 4229,3634 4229,3591 4208,3570 4165,3570 4141,3546 4141,3409 4400,3150
M14: "RIGHT HDR.32" H4.42 | length 6942
  Mid-Layer 2 w8: H4.42@3475,3350 3425,3400 3425,3768 3445,3788 3488,3788 3509,3809 3509,3852 3533,3876 3576,3876 3597,3897 3597,3940 3621,3964 3664,3964 3685,3985 3685,4028 3709,4052 3752,4052 3773,4073 3773,4116 3797,4140 3840,4140 3861,4161 3861,4204 3885,4228 3928,4228 3949,4249 3949,4292 3973,4316 4016,4316 4037,4337 4037,4380 4061,4404 4104,4404 4125,4425 4125,4468 4149,4492 4192,4492 4213,4513 4213,4556 4237,4580 4280,4580 4301,4601 4301,4644 4325,4668 4368,4668 4389,4689 4389,4732 4413,4756 4456,4756 4477,4777 4477,4820 4501,4844 4544,4844 4565,4865 4565,4908 4589,4932 4632,4932 4653,4953 4924,4953 4957,4920 4957,4899 4940,4882 4940,4861 4957,4844 4957,4823 4940,4806 4940,4785 4957,4768 4957,4747 4940,4730 4940,4709 4957,4692 4957,4671 4940,4654 4940,4633 4957,4616 4957,4595 4940,4578 4940,4557 4957,4540 4957,4519 4940,4502 4940,4481 4957,4464 4957,4443 4940,4426 4940,4405 4957,4388 4957,4367 4940,4350 4940,4329 4957,4312 4957,4291 4940,4274 4940,4253 4957,4236 4957,4215 4940,4198 4940,4177 4957,4160 4957,4139 4940,4122 4940,4101 4957,4084 4957,4063 4940,4046 4940,4025 4957,4008 4957,3987 4940,3970 4940,3949 4957,3932 4957,3911 4940,3894 4940,3873 4957,3856 4957,3835 4940,3818 4940,3797 4957,3780 4957,3759 4940,3742 4940,3721 4957,3704 4957,3683 4940,3666 4940,3645 4957,3628 4957,3607 4940,3590 4940,3569 4957,3552 4957,3531 4940,3514 4940,3493 4957,3476 4957,3455 4940,3438 4940,3417 4957,3400 4957,3379 4940,3362 4940,3341 4957,3324 4957,3303 4940,3286 4940,3265 4957,3248 4957,3227 4940,3210 4940,3189 4957,3172 4957,3151 4940,3134 4940,3113 4957,3096 4957,3075 4940,3058 4940,3037 4957,3020 4957,2999 4940,2982 4940,2961 4957,2944 4957,2923 4940,2906 4940,2885 4957,2868 4957,2847 4940,2830 4940,2809 4957,2792 4957,2771 4940,2754 4940,2733 4957,2716 4957,2695 4940,2678 4940,2657 4957,2640 4957,2587 4920,2550 4883,2550 4846,2587 4846,2640 4863,2657 4863,2678 4846,2695 4846,2716 4863,2733 4863,2754 4846,2771 4846,2792 4863,2809 4863,2830 4846,2847 4846,2868 4863,2885 4863,2906 4846,2923 4846,2944 4863,2961 4863,2982 4826,3019 4789,3019 4752,2982 4752,2961 4769,2944 4769,2923 4752,2906 4752,2885 4769,2868 4769,2847 4752,2830 4752,2809 4769,2792 4769,2771 4752,2754 4752,2733 4769,2716 4769,2695 4752,2678 4572,2678 4500,2750
N5: "BOTTOM HDR.26" P2.10 | length 6905.4
  Bottom Layer w8: 2800,600 2565,835 2216,835 2174,877 2174,899 2241.5,966.5 2241.5,985.5 2223.5,1003.5 2205.5,1003.5 2136,934 2117,934 2098,953 2098,969 2650,1521 2650,1949 2749,2048 2749,2129 2880,2260 2880,2277 2865,2292 2848,2292 2712,2156 2712,2066 2607,1961 2607,1543 2067,1003 2048,1003 2029,1022 2029,1038 2568,1577 2568,1977 2674,2083 2674,2173 2794,2293 2794,2333 2825,2364 2866,2364 3143,2087 3143,1882 P2.10@3275,1750
N6: "RIGHT HDR.23" H4.12 | length 6897.1
  Mid-Layer 1 w8: H4.12@3475,1850 3525,1800 3525,1611 3536,1600 3823,1600 3839,1584 3839,1442 3716,1319 3716,560 3739,537 3792,537 3845,484 3845,383 3873,355 4053,355 4186,222 4706,222 4723,239 4723,261 4706,278 4203,278 4082,399 3916,399 3895,420 3895,495 3827,563 3827,584 3855,612 3881,612 3955,538 3955,463 3976,442 4123,442 4231,334 4706,334 4723,351 4723,1914 4687,1950 4600,1950 4500,1850
N7: "BOTTOM HDR.29" P2.16 | length 6971.7
  Mid-Layer 1 w8: 2500,600 2449,549 2449,388 2530,307 2790,307 2814,283 2814,252 2790,228 2415,228 2391,204 2391,173 2415,149 2790,149 2814,125 2814,94 2790,70 2373,70 2349,94 2349,634 2243,740 2095,740 1937,898 1937,1000 2079,1142 2079,1220 2109,1250 2161,1250 2533,1622 2533,1646 2520,1659 2490,1659 2124,1293 2095,1293 2082,1306 2082,1331 2531,1780 2531,1993 2632,2094 2632,2197 2757,2322 2757,2439 2811,2493 2883,2493 2913,2463 2913,2412 P2.16@3275,2050
N8: "RIGHT HDR.14" H4.15 | length 7020.5
  Bottom Layer w8: H4.15@3575,2050 3597,2050 3957,1690 3957,1199 3979,1177 4207,1177 4229,1199 4229,1228 4207,1250 4024,1250 4002,1272 4002,1301 4024,1323 4207,1323 4229,1345 4229,1374 4207,1396 4024,1396 4002,1418 4002,1447 4024,1469 4207,1469 4229,1491 4229,1520 4207,1542 4024,1542 4002,1564 4002,1593 4024,1615 4207,1615 4229,1637 4229,1666 4207,1688 4024,1688 4002,1710 4002,1739 4024,1761 4207,1761 4221,1775 4221,1804 4199,1826 3958,1826 3936,1848 3936,1877 3958,1899 4199,1899 4221,1921 4221,1950 4199,1972 3829,1972 3807,1994 3807,2310 3828,2331 3854,2331 3875,2310 3875,2034 3896,2013 3922,2013 3943,2034 3943,2310 3964,2331 3990,2331 4011,2310 4011,2034 4032,2013 4058,2013 4079,2034 4079,2310 4100,2331 4126,2331 4147,2310 4147,2034 4168,2013 4194,2013 4231,2050 4400,2050